# EAGLE board Autodesk Nano Card PCB (EAGLE 9.7.0)
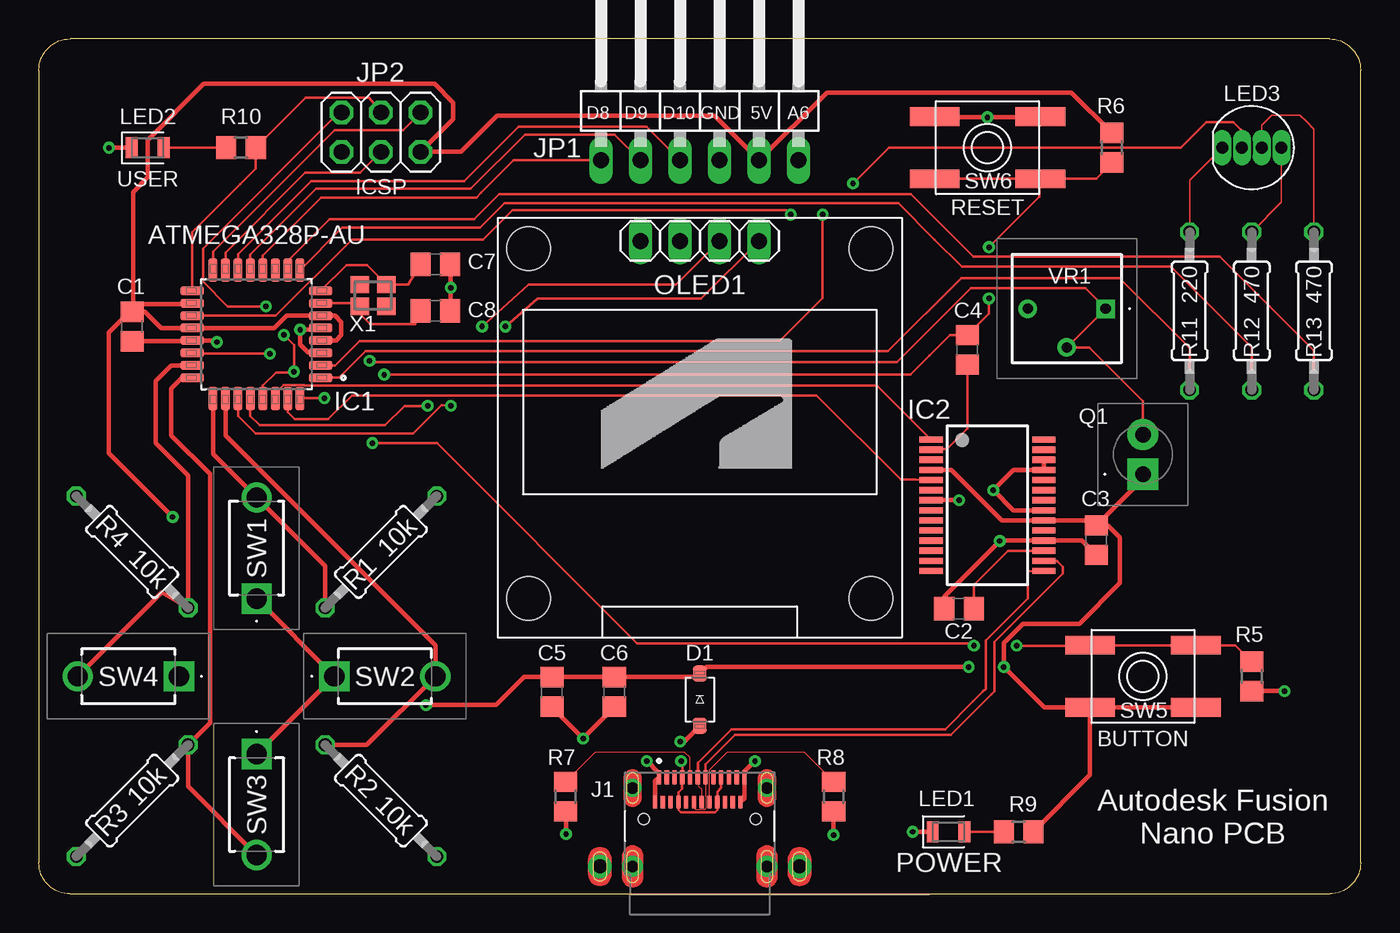
[diagram p0: board, top side]
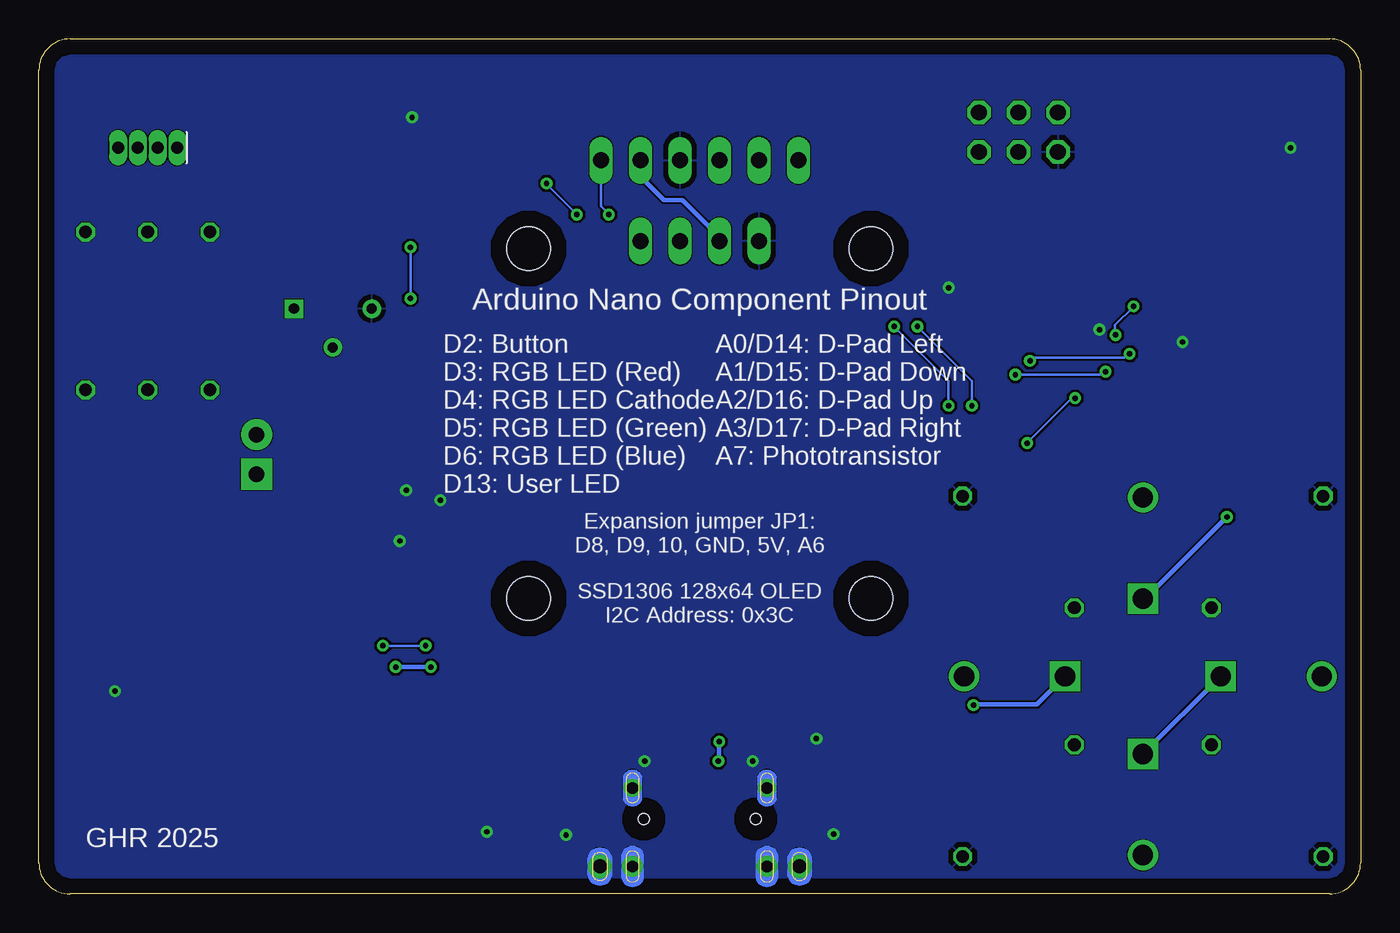
[diagram p1: board, bottom side, seen from below]

Size 85 x 55 mm. Coordinates in mm from the lower left corner, seen from the top.
Outline: 2,0 83,0 arc90 85,2 85,53 arc90 83,55 2,55 arc90 0,53 0,2 arc90 2,0
Copper layers (1*16): Top / Bottom
Stack-up Default Layer Stack: Top User Defined 0.035mm / Dielectric-1 User Defined 1.5mm / Bottom User Defined 0.035mm
Design rules: minimum copper width 0.06mm, minimum drill size 0.35mm, copper clearance wire_polygon to wire_polygon 0.06mm, copper clearance wire_polygon to pad_smd 0.0524mm, copper clearance wire_polygon to via 6mil, copper clearance pad_smd to pad_smd 6mil, copper clearance pad_smd to via 6mil, copper clearance via to via 6mil, copper clearance smd to pad (same net) 6mil, copper clearance smd to via (same net) 6mil, copper clearance smd to smd (same net) 6mil, dimension clearance 0.16mm, via restrict clearance 0mil, restrict clearance 0mil, drill distance 6mil, keepout clearance 0mil

## Footprints (pad centres in the part's own frame; a part is rotated, then mirrored left to right if it is on the bottom)
C0805 = smd 1.3 x 1.5: 1 -0.95,0; 2 0.95,0
SOD-123 = smd 1.02 x 0.86: A 1.68,0; C -1.68,0
TQFP-32 = smd 1.5 x 0.57: 1 -4.13,2.8; 2 -4.13,2; 3 -4.13,1.2; 4 -4.13,0.4; 5 -4.13,-0.4; 6 -4.13,-1.2; 7 -4.13,-2; 8 -4.13,-2.8; 17 4.13,-2.8; 18 4.13,-2; 19 4.13,-1.2; 20 4.13,-0.4; 21 4.13,0.4; 22 4.13,1.2; 23 4.13,2; 24 4.13,2.8 | smd 0.57 x 1.5: 9 -2.8,-4.13; 10 -2,-4.13; 11 -1.2,-4.13; 12 -0.4,-4.13; 13 0.4,-4.13; 14 1.2,-4.13; 15 2,-4.13; 16 2.8,-4.13; 25 2.8,4.13; 26 2,4.13; 27 1.2,4.13; 28 0.4,4.13; 29 -0.4,4.13; 30 -1.2,4.13; 31 -2,4.13; 32 -2.8,4.13
SSOP28 = smd 0.4 x 1.5: 1 -4.225,-3.625; 2 -3.575,-3.625; 3 -2.925,-3.625; 4 -2.275,-3.625; 5 -1.625,-3.625; 6 -0.975,-3.625; 7 -0.325,-3.625; 8 0.325,-3.625; 9 0.975,-3.625; 10 1.625,-3.625; 11 2.275,-3.625; 12 2.925,-3.625; 13 3.575,-3.625; 14 4.225,-3.625; 15 4.225,3.625; 16 3.575,3.625; 17 2.925,3.625; 18 2.275,3.625; 19 1.625,3.625; 20 0.975,3.625; 21 0.325,3.625; 22 -0.325,3.625; 23 -0.975,3.625; 24 -1.625,3.625; 25 -2.275,3.625; 26 -2.925,3.625; 27 -3.575,3.625; 28 -4.225,3.625
AMPHENOL_12402056E512A = smd 0.27 x 0.9: A1 -2.625,2.7; A2 -2.125,2.7; A3 -1.625,2.7; A4 -1.125,2.7; A5 -0.625,2.7; A6 -0.125,2.7; A7 0.375,2.7; A8 0.875,2.7; A9 1.375,2.7; A10 1.875,2.7; A11 2.375,2.7; A12 2.875,2.7 | smd 0.27 x 0.8: B1 2.625,1.1; B2 2.125,1.1; B3 1.625,1.1; B4 1.125,1.1; B5 0.625,1.1; B6 0.125,1.1; B7 -0.375,1.1; B8 -0.875,1.1; B9 -1.375,1.1; B10 -1.875,1.1; B11 -2.375,1.1; B12 -2.875,1.1 | drill 0.9 pad 1.5: SH1 -6.42,-3.05; SH4 6.42,-3.05 | drill 0.75 pad 1.15: SH2 -4.32,2; SH5 4.32,2 | drill 0.75 pad 1.35: SH3 -4.32,-3.05; SH6 4.32,-3.05 | hole 0.72: -3.6,0; 3.6,0
1X06/90 = drill 1.016 long: 1 -6.35,-3.81; 2 -3.81,-3.81; 3 -1.27,-3.81; 4 1.27,-3.81; 5 3.81,-3.81; 6 6.35,-3.81
2X03 = drill 1.016 octagon: 1 -2.54,-1.27; 2 -2.54,1.27; 3 0,-1.27; 4 0,1.27; 5 2.54,-1.27; 6 2.54,1.27
LEDC2012X110N_FLAT-Y = smd 0.762 x 1.362: A 1.025,0; C -1.025,0
LED-RGB-THRU = drill 0.762 pad 0.889 long: 1 -1.905,0; 2 -0.635,0; 3 0.635,0; 4 1.905,0
0.94-4PIN = drill 1.016 long: GND -3.81,0; SCL 1.27,0; SDA 3.81,0; VCC -1.27,0 | hole 2.8: -11,-0.5; 11,-0.5; -11,-23; 11,-23
SFH309 = drill 1 pad 2 square: 1 0,0 | drill 1 pad 2: 2 0,2.54
0207/10 = drill 0.813 octagon: 1 -5.08,0; 2 5.08,0
R0805 = smd 1.3 x 1.5: 1 -0.95,0; 2 0.95,0
DTS32NVB = drill 1.3 pad 1.95 square: 1 0,0 | drill 1.3 pad 1.95: 2 6.5,0
EVQ-Q2 = smd 3.2 x 1.2: A -3.4,-2; A' 3.4,-2; B -3.4,2; B' 3.4,2
FT63ETP = drill 0.65 pad 1.192 square: 1 0,0 | drill 0.65 pad 1.192: 2 2.5,2.5; 3 5,0
FA-20H = smd 1.2 x 1.1: 1 -0.85,-0.7; 2 0.85,-0.7; 3 0.85,0.7; 4 -0.85,0.7

## Placement (x,y rotation side)
C1  0.1u  [C0805]  6,36.5 270 top
C2  10n  [C0805]  59.17,18.35 0 top
C3  0.1u  [C0805]  68,22.75 270 top
C4  0.1u  [C0805]  59.71,35 90 top
C5  0.1u  [C0805]  33,13 270 top
C6  4.7u  [C0805]  37,13 270 top
C7  15p  [C0805]  25.5,40.5 0 top
C8  15p  [C0805]  25.5,37.5 0 top
D1  MBR0520LT1G  [SOD-123]  42.5,12.5 270 top
IC1  ATMEGA328P-AU  [TQFP-32]  14,36 180 top
IC2  FT232RL  [SSOP28]  61,25 270 top
J1  USB-C 12402056E512A  [AMPHENOL_12402056E512A]  42.5,4.82 0 top
JP1  D8 D9 D10 GND 5V A6  [1X06/90]  42.5,51 0 top
JP2  ICSP  [2X03]  22,49 180 top
LED1  POWER  [LEDC2012X110N_FLAT-Y]  58.5,4 0 top
LED2  USER  [LEDC2012X110N_FLAT-Y]  7,48 0 top
LED3  RGB  [LED-RGB-THRU]  78,48 180 top
OLED1  ESTARDYN-0.96-4PIN-OLED  [0.94-4PIN]  42.5,42 0 top
Q1  SFH_309  [SFH309]  71,27 0 top
R1  10k  [0207/10]  22,22 45 top
R2  10k  [0207/10]  22,6 315 top
R3  10k  [0207/10]  6,6 225 top
R4  10k  [0207/10]  6,22 135 top
R5  10k  [R0805]  78,14 270 top
R6  10k  [R0805]  69,48 270 top
R7  5.1K  [R0805]  33.87,6.27 90 top
R8  5.1K  [R0805]  51.12,6.27 90 top
R9  680  [R0805]  63,4 0 top
R10  330  [R0805]  13,48 0 top
R11  220  [0207/10]  74,37.5 270 top
R12  470  [0207/10]  78,37.5 270 top
R13  470  [0207/10]  82,37.5 270 top
SW1  A2  [DTS32NVB]  14,19 90 top
SW2  A3  [DTS32NVB]  19,14 0 top
SW3  A1  [DTS32NVB]  14,9 270 top
SW4  A0  [DTS32NVB]  9,14 180 top
SW5  BUTTON  [EVQ-Q2]  71,14 0 top
SW6  RESET  [EVQ-Q2]  61,48 0 top
VR1  FT-63ETP202  [FT63ETP]  68.6,37.65 180 top
X1  X20AB1-16MHz  [FA-20H]  21.5,38.5 0 top

## Library data of the parts
C1-C8 = rcl; SPICEPREFIX: C
D1 = Diodes; CREATED_BY: PCBLayout.com; DIGIKEY_PART_NUMBER: MBR0520LT1GOSTR-ND; MANUFACTURER: ON Semiconductor; MPN: MBR0520LT1G; PACKAGE: SOD-123
IC1 = Microcontroller; CREATED_BY: PCBLayout.com; DIGIKEY_PART_NUMBER: ATMEGA328P-AU-ND; MANUFACTURER: Microchip Technology; MPN: ATMEGA328P-AU; PACKAGE: TQFP-32
IC2 = ftdichip; MPN: FT232RL; OC_FARNELL: 1146032; OC_NEWARK: 91K9918
J1 = 12402056E512A; MANUFACTURER: Amphenol; MAXIMUM_PACKAGE_HEIGHT: 3.43mm; PARTREV: 5; SNAPEDA_PN: 12402056E512A; STANDARD: Manufacturer Recommendations
JP1 = Connector; CATEGORY: Headers; DESCRIPTION: Header-Right Angle-6 Position; PACKAGE_TYPE: THT; PITCH: 0.100" (2.54mm); SUBCATEGORY: Headers-Male Pins; TYPE: Board to Board or Cable-Unshrouded-Through Hole-Right Angle
JP2 = Connector; CATEGORY: Headers; DESCRIPTION: Header, Straight, 2x3 Position; MANUFACTURER: Generic; MPN: Generic; OPERATING_TEMPERATURE: Generic; PART_STATUS: Active; PITCH: 0.100" (2.54mm); ROHS_COMPLIANCE: Generic; SERIES: Generic; SUB-CATEGORY: Headers, Male Pins; TYPE: Board to Board or Cable, Unshrouded, Through Hole, Straight
LED1 LED2 = LED; CATEGORY: LED; COLOR: YELLOW; DESCRIPTION: CHIP LED FLAT; SUB-CATEGORY: CHIP; TYPE: FLAT_TOP
LED3 = DTS-32N-V-B; PROD_ID: DIO-09434
OLED1 = DTS-32N-V-B
Q1 = DTS-32N-V-B; DESCRIPTION: SFH 309 Osram Opto 24 Full Spectrum Phototransistor, Through Hole 2-Pin 3mm (T-1) package; HEIGHT: 6.3mm; MANUFACTURER_NAME: ams OSRAM; MANUFACTURER_PART_NUMBER: SFH 309; MOUSER_PART_NUMBER: 720-SFH309; MOUSER_PRICE-STOCK: https://www.mouser.co.uk/ProductDetail/ams-OSRAM/SFH-309?qs=nTDll3UaDK7IiBI7L0xvOA%3D%3D
R1-R13 = rcl; SPICEPREFIX: R
SW1-SW4 = DTS-32N-V-B; DESCRIPTION: 3.5mm 5mm Rectangle button 50mA Direct Insert 6mm SPST 12V Plugin Tactile Switches ROHS; HEIGHT: 5mm; MANUFACTURER_NAME: Diptronics; MANUFACTURER_PART_NUMBER: DTS-32N-V-B; MOUSER_PART_NUMBER: 113-DTS-32N-V-B; MOUSER_PRICE-STOCK: https://www.mouser.co.uk/ProductDetail/Diptronics/DTS-32N-V-B?qs=gTYE2QTfZfRJupfs8INq2A%3D%3D
SW5 SW6 = adafruit
VR1 = DTS-32N-V-B; DESCRIPTION: Trimmer Resistors - Through Hole 10 KW 6mm comm. single turn top adjust on tape; HEIGHT: 6.1mm; MANUFACTURER_NAME: Nidec Copal; MANUFACTURER_PART_NUMBER: FT-63ETP103; MOUSER_PART_NUMBER: 229-FT-63ETP103; MOUSER_PRICE-STOCK: https://www.mouser.co.uk/ProductDetail/Nidec-Copal/FT-63ETP103?qs=XeJtXLiO41Qx3Me652cD7g%3D%3D
X1 = crystal

## Nets
+5V [Power]: C1.1 C3.1 C5.1 C6.1 D1.C IC1.4 IC1.6 IC1.18 IC1.20 IC2.4 IC2.20 JP1.5 JP2.2 OLED1.VCC Q1.1 R6.1 R9.2 SW1.1 SW2.1 SW3.1 SW4.1 SW5.A SW5.A'
+VUSB [Power]: D1.A J1.A4 J1.A9 J1.B4 J1.B9
A6: IC1.19 JP1.6
A7/PHOTO: IC1.22 Q1.2 VR1.1 VR1.2
BT_DN: IC1.24 R3.1 SW3.2
BT_LF: IC1.23 R4.1 SW4.2
BT_RT: IC1.26 R2.1 SW2.2
BT_UP: IC1.25 R1.1 SW1.2
CC1: J1.A5 R7.2
CC2: J1.B5 R8.2
D0/RXD: IC1.30 IC2.1
D1/TXD: IC1.31 IC2.5
D2/BT_A: IC1.32 R5.1 SW5.B SW5.B'
D3/LED_RED: IC1.1 R11.2
D4/RGB_CATHODE: IC1.2 LED3.3
D5/LED_GREEN: IC1.9 R12.2
D6/LED_BLUE: IC1.10 R13.2
D7: IC1.11
D8: IC1.12 JP1.1
D9: IC1.13 JP1.2
D10: IC1.14 JP1.3
D11/MOSI: IC1.15 JP2.4
D12/MISO: IC1.16 JP2.1
D13/SCK: IC1.17 JP2.3 R10.2
DTR: C4.1 IC2.2
GND [Power]: C1.2 C2.1 C3.2 C5.2 C6.2 C7.2 C8.2 IC1.3 IC1.5 IC1.21 IC2.7 IC2.18 IC2.21 IC2.25 IC2.26 J1.A1 J1.A12 J1.B1 J1.B12 JP1.4 JP2.6 LED1.C LED2.C OLED1.GND R1.2 R2.2 R3.2 R4.2 R5.2 R7.1 R8.1 SW6.B SW6.B' VR1.3
N$2: LED3.4 R11.1
N$3: LED1.A R9.1
N$4: C8.1 IC1.7 X1.1
N$5: C7.1 IC1.8 X1.3
N$6: LED3.2 R13.1
N$7: LED3.1 R12.1
N$8: C2.2 IC2.17
N$9: LED2.A R10.1
RST: C4.2 IC1.29 JP2.5 R6.2 SW6.A SW6.A'
SCL: IC1.28 OLED1.SCL
SDA: IC1.27 OLED1.SDA
USB_DM: IC2.16 J1.A7 J1.B7
USB_DP: IC2.15 J1.A6 J1.B6

## Tracks (layer width: path | path; a pad name or v marks a point on that pad's centre or on a via)
+5V  (via drill 0.35)
  Top 0.305: IC1.4 19.1,35.6 19.45,35.95 19.45,36.8 19.05,37.2 IC1.6 15.95,37.21 15.14,36.4 10.3,36.4 IC1.20 7.85,36.4 7.6,36.65 6.8,37.45 6.05,37.45 | C1.1 6.05,37.45 | SW1.1 SW2.1 SW3.1 | 33.23,13.76 C5.1 | v24.9,12.15 29.4,12.15 31.2,13.95 C5.1 | v8.6,24.25 4.5,28.35 4.5,36.1 5.85,37.45 C1.1 | SW5.A SW5.A' | 6.05,37.45 6.05,45.15 7,46.1 7,48.5 10.6,52.1 24.3,52.1 25.45,52.1 26.65,50.9 26.65,49.84 JP2.2 27.14,47.73 29.46,50.05 39.35,50.05 43.45,50.05 JP1.5 50.67,51.55 51.45,51.55 66.4,51.55 R6.1 | IC1.18 9.82,37.95 8.85,37.95 6.5,37.95 C1.1 | IC2.4 58.67,27.27 58.95,27 61.92,24.02 IC2.20 67.67,24.02 C3.1 | C3.1 68.75,23.7 69.53,22.92 69.53,20 66.9,17.37 63.27,17.37 62.05,16.15 62.06,16.14 v62.06,14.6 64.66,12 SW5.A | C3.1 71,26.7 Q1.1 | C5.1 C6.1 40.22,13.95 42.27,13.95 D1.C 42.92,14.6 43.42,14.6 v59.8,14.6 | SW5.A 67.6,7.65 R9.2
  Bottom 0.305: v24.9,12.15 24.85,12.2 20.8,12.2 SW2.1 | JP1.5 46.31,46.14 44.81,44.64 43.61,44.64 41.23,42.26 OLED1.VCC | v8.6,24.25 13.85,19 SW1.1 | v62.06,14.6 v59.8,14.6 | SW4.1 SW3.1
+VUSB  (via drill 0.35)
  Top 0.15: 41.28,5.25 43.47,5.25
  Top 0.152: J1.A9 43.88,6.83 43.62,6.58 J1.B4 43.62,5.4 43.47,5.25 | 41.28,5.25 41.12,5.4 J1.B9 41.12,6.53 41.36,6.77 41.36,7.5 J1.A4 41.38,8.47 v41.3,8.55
  Top 0.305: D1.A 41.48,9.8 v41.25,9.8
  Bottom 0.152: v41.3,8.55 41.25,8.6
  Bottom 0.305: 41.25,8.6 v41.25,9.8
A6  (via drill 0.35)
  Top 0.152: IC1.19 9.88,37.19 15.24,37.19 20.13,42.08 28.55,42.08 30.47,43.99 48.06,43.99 48.3,43.75 v48.35,43.7
  Bottom 0.152: JP1.6 48.85,44.25 v48.35,43.7
A7/PHOTO  (via drill 0.35)
  Top 0.152: Q1.2 71,31.7 67.55,35.15 VR1.2 VR1.1 67.29,38.96 59.92,38.96 55.17,34.2 21.36,34.2 v21.27,34.3 | v14.85,34.75 9.92,34.75 IC1.22
  Bottom 0.152: v14.85,34.75 14.95,34.75 15.2,34.5 21.07,34.5 v21.27,34.3
BT_DN
  Top 0.305: SW3.2 9.59,6.91 R3.1 11,11 11,27 8.5,29.5 8.5,32.5 9.2,33.2 IC1.24
BT_LF
  Top 0.305: SW4.2 7.91,19.41 R4.1 9.59,26.91 7.5,29 7.5,32 7.5,33 8.5,34 IC1.23
BT_RT
  Top 0.305: R2.1 21.09,9.59 SW2.2 25.5,16 12,29.5 12,30 IC1.26
BT_UP
  Top 0.305: R1.1 18.41,21.09 SW1.2 11.2,28.3 IC1.25
CC1
  Top 0.076: J1.A5 41.88,8.78 41.54,9.12 35.77,9.12 R7.2
CC2
  Top 0.076: R8.2 49.19,9.15 44.3,9.15 43.14,7.99 43.14,5.93 J1.B5
D0/RXD
  Top 0.152: IC1.30 15.2,32.2 15.74,32.75 17.06,32.75 17.11,32.7 52.93,32.7 53.9,32.7 IC2.1
D1/TXD
  Top 0.152: IC1.31 16,31.54 16,30.98 16.44,30.54 18.61,30.54 20.13,32.06 50.01,32.06 55.42,26.65 56.35,26.65 IC2.5
D2/BT_A  (via drill 0.35)
  Top 0.152: 74.55,16 SW5.B' | SW5.B' SW5.B 67.57,15.97 v62.88,15.97 | v18.36,31.89 16.82,31.89 IC1.32 | v21.45,29 25.6,29 38.48,16.12 59.98,16.12 v60.13,15.97 | R5.1 76.95,16 SW5.B'
  Bottom 0.152: v18.36,31.89 18.55,31.89 v21.45,29 | v62.88,15.97 v60.13,15.97
D3/LED_RED
  Top 0.152: IC1.1 19.3,33.2 21,34.91 54.6,34.91 59.31,39.62 69.5,39.62 73.97,35.15 74,35.12 R11.2
D4/RGB_CATHODE  (via drill 0.35)
  Top 0.152: IC1.2 19.07,34 20.61,35.55 47.63,35.55 50.4,38.32 v50.4,43.7 | v52.35,45.7 54.65,48 73.44,48 75.08,49.64 76.81,49.64 77.3,49.15 77.36,49.09 LED3.3
  Bottom 0.152: v52.35,45.7 52.35,45.65 v50.4,43.7
D5/LED_GREEN
  Top 0.152: IC1.9 19.52,42.85 28.36,42.85 29.95,44.44 49.82,44.44 55.26,44.44 57.6,42.1 59.35,40.35 72.8,40.35 78,35.15 R12.2
D6/LED_BLUE
  Top 0.152: IC1.10 16,40.7 18.7,43.4 19.95,43.4 28,43.4 29.6,45 56.09,45 60.1,40.99 75.96,40.99 82,34.95 R13.2
D8
  Top 0.152: IC1.12 14.4,41.05 18.15,44.8 20.2,44.8 28.15,44.8 28.45,45.1 30.54,47.19 JP1.1
D9
  Top 0.152: JP1.2 37.03,48.85 31.25,48.85 27.75,45.35 17.83,45.35 13.6,41.12 IC1.13
D10
  Top 0.152: IC1.14 12.8,41.15 17.5,45.85 27.3,45.85 27.35,45.85 30.85,49.35 39.07,49.35 JP1.3
D11/MOSI
  Top 0.152: IC1.15 12,41.26 17.12,46.38 20.65,46.38 JP2.4
D12/MISO
  Top 0.152: IC1.16 11.2,41.32 19.02,49.14 23.41,49.14 JP2.1
D13/SCK
  Top 0.152: IC1.17 9.87,42.57 10.05,42.75 12.95,45.65 13.95,46.65 R10.2 17.17,51.22 21.24,51.22 JP2.3
DTR
  Top 0.152: IC2.2 57.42,28.62 58.41,28.62 59.71,29.93 C4.1
GND  (via drill 0.35)
  Top 0.305: v51.1,3.8 51.1,5.3 R8.1 | R7.1 33.9,5.29 v33.9,3.85 | C1.2 9.82,35.55 IC1.21 11.35,35.6 v11.45,35.5 | IC1.5 18.03,36.3 v16.8,36.3 16.8,35.34 17.31,34.84 18.09,34.84 IC1.3 | LED1.C v56.2,4 | v4.5,48 LED2.C | C7.2 v26.5,39 C8.2 | SW6.B' 64.36,49.96 v61,49.96 57.64,49.96 SW6.B | C2.1 58.22,19.13 v61.79,22.7 61.82,22.73 IC2.18 67.08,22.73 C3.2 | IC2.21 62.67,24.68 v61.38,25.98 62.67,27.27 IC2.25 IC2.26 | IC2.7 v59.17,25.32 | C5.2 33.65,11.35 v35,10 36.35,11.35 C6.2 | v39.1,8.55 39.88,7.78 J1.A1 39.62,7.27 J1.B12 | J1.B1 45.38,6.17 J1.A12 45.38,7.88 v46.05,8.55 | v80.1,13.05 R5.2
  pour Bottom: 85.65,55.7 -0.5,55.7 -0.5,-0.6 85.65,-0.6
N$2
  Top 0.102: R11.1 74,45.91 LED3.4
N$3
  Top 0.152: R9.1 LED1.A
N$4
  Top 0.152: C8.1 24.2,36.65 21.3,36.65 20.65,37.3 X1.1 20.45,38 IC1.7
N$5
  Top 0.152: IC1.8 19.78,40.45 21,40.45 21.1,40.45 X1.3 23.75,39.2 C7.1
N$6
  Top 0.102: R13.1 82,49.2 81.5,49.7 81.1,50.1 79.3,50.1 78.64,49.44 LED3.2
N$7
  Top 0.102: R12.1 79.91,44.48 LED3.1
N$8
  Top 0.152: C2.2 60.12,19.87 62.33,22.07 IC2.17
N$9
  Top 0.152: LED2.A R10.1
RST  (via drill 0.35)
  Top 0.152: 64.35,46 SW6.A' 68,46 69,47 R6.2 | 64.35,46 SW6.A | IC1.29 14.39,31.88 14.39,32.69 15.25,33.55 16.35,33.55 v16.4,33.6 16.4,35.31 v15.76,35.95 | v14.6,37.79 12.16,37.79 10.55,39.4 10.55,41.51 19.31,50.27 JP2.5 | v61.1,41.6 64.35,44.85 64.35,46 | v22.2,33.41 56.05,33.41 57.27,34.62 58.6,35.95 C4.2 61.1,37.34 v61.1,38.3
  Bottom 0.152: v14.6,37.79 15.81,36.59 15.81,36 v15.76,35.95 | v61.1,41.6 v61.1,38.3 | v22.2,33.41 16.59,33.41 v16.4,33.6
SCL  (via drill 0.35)
  Top 0.152: IC1.28 13.6,30.75 14.2,30.15 22.27,30.15 23.52,31.4 v25,31.4 | v28.5,36.5 31.49,39.19 40.96,39.19 OLED1.SCL
  Bottom 0.152: v25,31.4 25,33 v28.5,36.5
SDA  (via drill 0.35)
  Top 0.152: IC1.27 12.8,30.75 13.95,29.61 24.06,29.61 25.91,31.45 v26.5,31.4 | v30,36.5 32.08,38.28 42.59,38.28 OLED1.SDA
  Bottom 0.152: v26.5,31.4 26.5,33 v30,36.5
USB_DM
  Top 0.076: J1.A7 42.88,6.31 42.89,6.29 42.89,5.52 42.8,5.43 42.25,5.43 42.12,5.55 J1.B7
  Top 0.15: J1.A7 42.88,8.33 44.78,10.23 58.65,10.23 61.25,12.84
  Top 0.152: 61.25,12.84 61.45,13.04 61.45,16.22 65.85,20.62 65.85,21.03 65.53,21.35 65.46,21.43 IC2.16
USB_DP
  Top 0.076: 42.62,6.18 42.62,6.72 42.6,6.75 42.42,6.92 42.38,6.97 J1.A6
  Top 0.15: 42.37,8.43 44.54,10.6 55.7,10.6 58.3,10.6 60.08,12.38
  Top 0.152: 42.62,6.18 J1.B6 | 60.08,12.38 60.72,13.03 60.9,13.2 60.9,16.3 63.6,19 63.6,20.75 IC2.15 | J1.A6 42.37,8.43

## Text on the board
SilkscreenTop: Autodesk Fusion / Nano PCB
SilkscreenBottom: Arduino Nano Component Pinout | A0/D14: D-Pad Left / A1/D15: D-Pad Down / A2/D16: D-Pad Up / A3/D17: D-Pad Right / A7: Phototransistor | D2: Button / D3: RGB LED (Red) / D4: RGB LED Cathode / D5: RGB LED (Green) / D6: RGB LED (Blue) / D13: User LED | Expansion jumper JP1: / D8, D9, 10, GND, 5V, A6 | SSD1306 128x64 OLED / I2C Address: 0x3C | GHR 2025
200bmp: /Users/Sam/Desktop/Geraint/autodesk-symbol.bmp